# EAGLE board SGP30 Breakout-Panel (EAGLE 9.3.0)
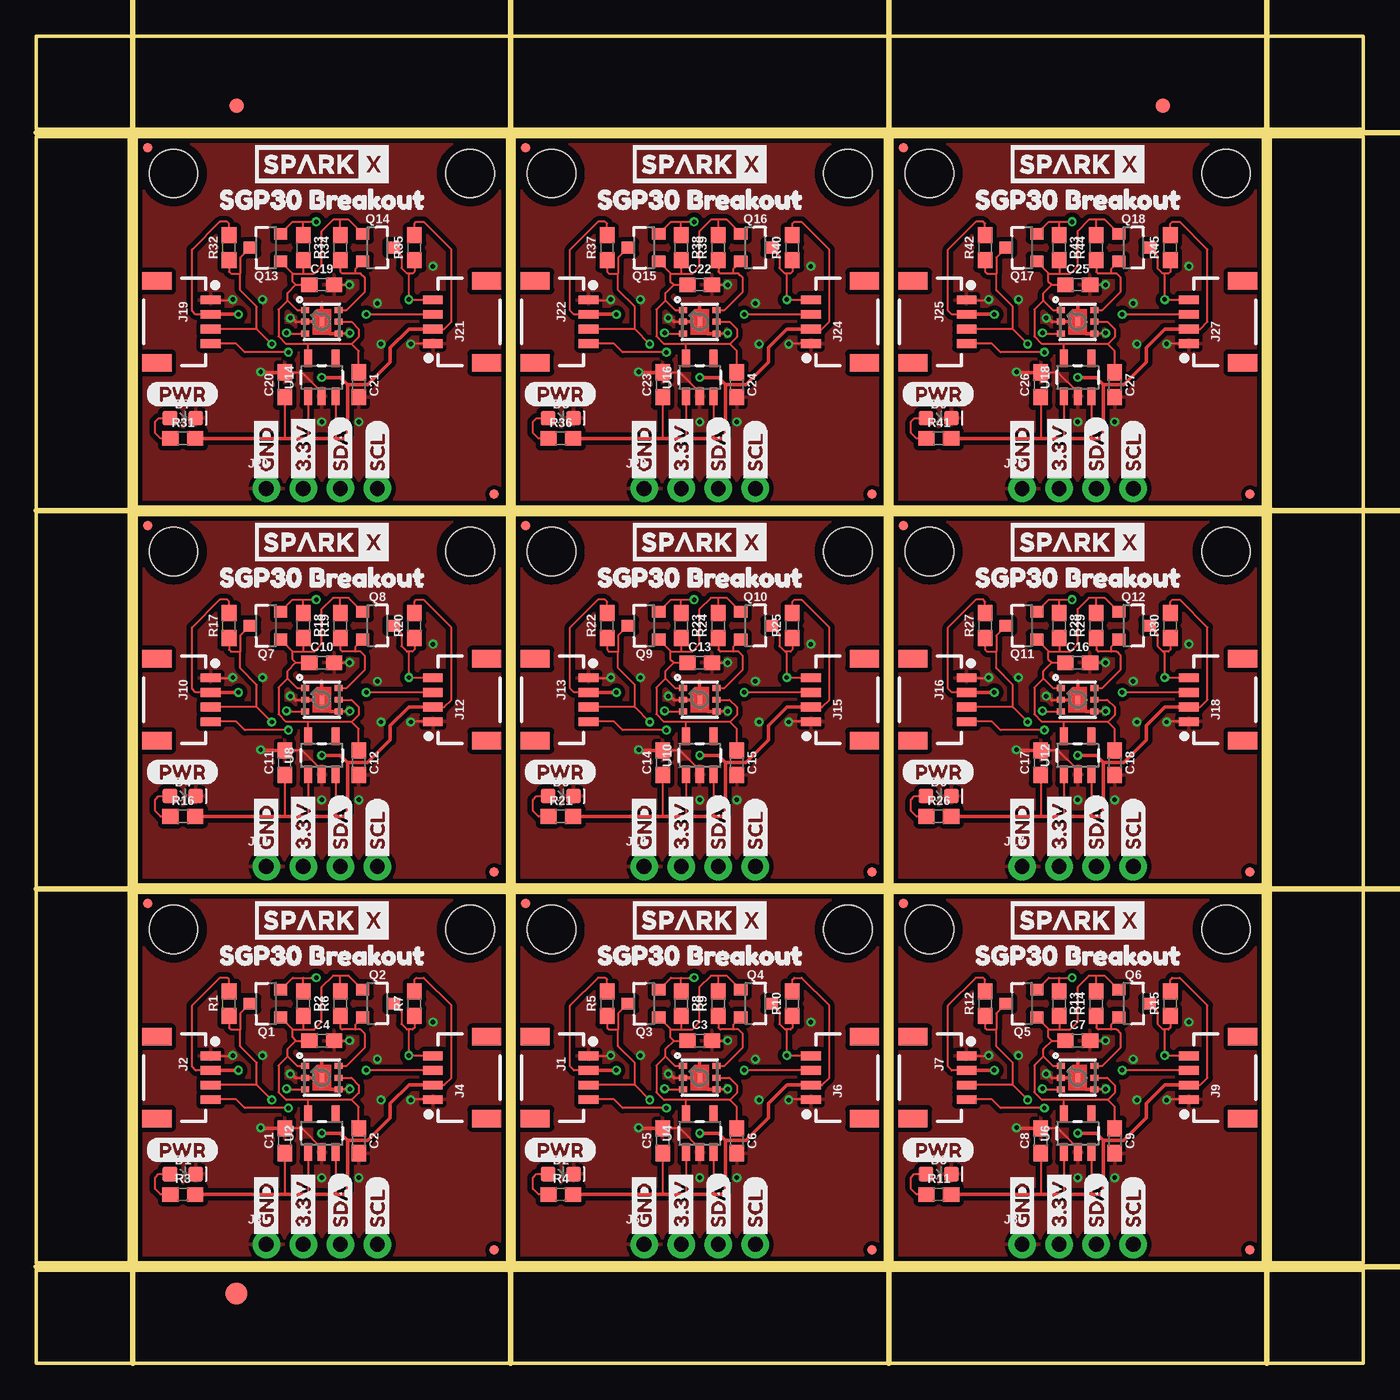
[diagram p0: board, top side]
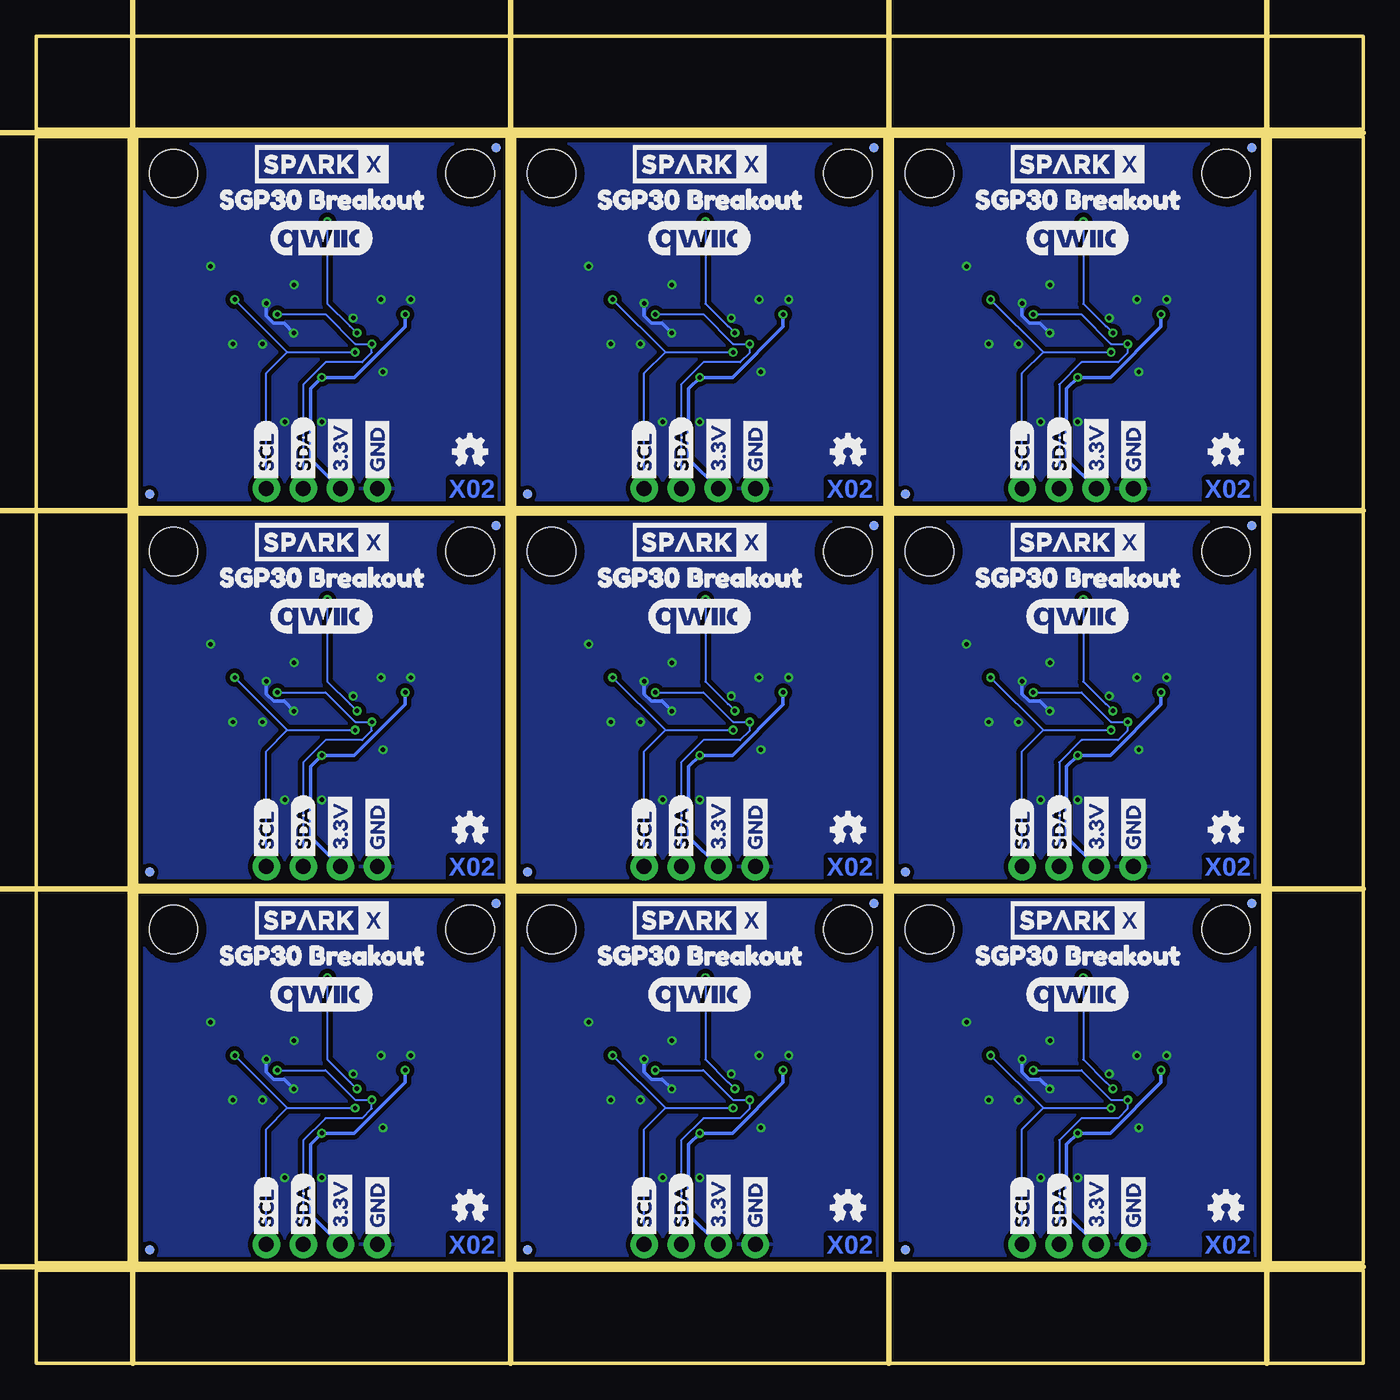
[diagram p1: board, bottom side, seen from below]

Size 90.93 x 90.93 mm. Coordinates in mm from the lower left corner, seen from the top.
Outline: 6.86,6.86 6.86,32.26 32.26,32.26 32.26,6.86 6.86,6.86
Outline: 32.77,6.86 32.77,32.26 58.17,32.26 58.17,6.86 32.77,6.86
Outline: 58.67,6.86 58.67,32.26 84.07,32.26 84.07,6.86 58.67,6.86
Outline: 6.86,32.77 6.86,58.17 32.26,58.17 32.26,32.77 6.86,32.77
Outline: 32.77,32.77 32.77,58.17 58.17,58.17 58.17,32.77 32.77,32.77
Outline: 58.67,32.77 58.67,58.17 84.07,58.17 84.07,32.77 58.67,32.77
Outline: 6.86,58.67 6.86,84.07 32.26,84.07 32.26,58.67 6.86,58.67
Outline: 32.77,58.67 32.77,84.07 58.17,84.07 58.17,58.67 32.77,58.67
Outline: 58.67,58.67 58.67,84.07 84.07,84.07 84.07,58.67 58.67,58.67
Outline: 0,6.35 90.93,6.35 90.93,0 0,0 0,6.35
Outline: 84.58,84.07 90.93,84.07 90.93,6.86 84.58,6.86 84.58,84.07
Outline: 0,90.93 90.93,90.93 90.93,84.58 0,84.58 0,90.93
Outline: 0,84.07 6.35,84.07 6.35,6.86 0,6.86 0,84.07
Copper layers (1*16): Top 0.035mm / dielectric 1.5mm / Bottom 0.035mm
Design rules "SparkFun-2-layer-PCBWay-LIMIT": minimum track width 6mil, minimum drill 0.3mm, track to track 6mil, track to pad 6mil, pad to pad 6mil, via to via 6mil, smd to smd 6mil, copper to edge 6mil, drill to drill 6mil, minimum pad ring 6mil, minimum via ring 6mil, stop-mask expansion 4mil, vias tented up to drill 25mil, thermal gap 10mil
Milling: 8 lines

## Footprints (pad centres in the part's own frame; a part is rotated, then mirrored left to right if it is on the bottom)
0603 = smd 1.1 x 1: 1 -0.85,0; 2 0.85,0
LED-0603 = smd 1 x 1: A -0.877,0; C 0.877,0
FIDUCIAL-1X2 = smd 1 x 1: 1 0,0
FIDUCIAL-1.5X3 = smd 1.5 x 1.5: 1 0,0
1X04_1MM_RA = smd 0.6 x 1.35: 1 -1.5,0; 2 -0.5,0; 3 0.5,0; 4 1.5,0 | smd 1.2 x 2: NC1 2.8,-3.675; NC2 -2.8,-3.675
1X04_NO_SILK = drill 1.016 pad 1.88: 1 0,0; 2 2.54,0; 3 5.08,0; 4 7.62,0
MICRO-FIDUCIAL = smd 0.635 x 0.635: 1 0,0
STAND-OFF = hole 3.302: 0,0
SOT23-3 = smd 0.8 x 0.9: 1 -0.95,-1; 2 0.95,-1; 3 0,1.1
SGP30 = smd 0.55 x 0.4: 1 -1.15,0.8; 2 -1.15,0; 3 -1.15,-0.8; 4 1.15,-0.8; 5 1.15,0; 6 1.15,0.8 | smd 0.305 x 0.61: DIEPAD 0,0
SOT23-5 = smd 0.55 x 1.2: 1 -0.95,-1.3; 2 0,-1.3; 3 0.95,-1.3; 4 0.95,1.3; 5 -0.95,1.3

## Placement (x,y rotation side)
C1  1.0uF  [0603]  17.02,15.24 90 top
C2  1.0uF  [0603]  22.1,15.24 270 top
C3  0.1uF  [0603]  45.47,22.1 0 top
C4  0.1uF  [0603]  19.56,22.1 0 top
C5  1.0uF  [0603]  42.93,15.24 90 top
C6  1.0uF  [0603]  48.01,15.24 270 top
C7  0.1uF  [0603]  71.37,22.1 0 top
C8  1.0uF  [0603]  68.83,15.24 90 top
C9  1.0uF  [0603]  73.91,15.24 270 top
C10  0.1uF  [0603]  19.56,48.01 0 top
C11  1.0uF  [0603]  17.02,41.15 90 top
C12  1.0uF  [0603]  22.1,41.15 270 top
C13  0.1uF  [0603]  45.47,48.01 0 top
C14  1.0uF  [0603]  42.93,41.15 90 top
C15  1.0uF  [0603]  48.01,41.15 270 top
C16  0.1uF  [0603]  71.37,48.01 0 top
C17  1.0uF  [0603]  68.83,41.15 90 top
C18  1.0uF  [0603]  73.91,41.15 270 top
C19  0.1uF  [0603]  19.56,73.91 0 top
C20  1.0uF  [0603]  17.02,67.06 90 top
C21  1.0uF  [0603]  22.1,67.06 270 top
C22  0.1uF  [0603]  45.47,73.91 0 top
C23  1.0uF  [0603]  42.93,67.06 90 top
C24  1.0uF  [0603]  48.01,67.06 270 top
C25  0.1uF  [0603]  71.37,73.91 0 top
C26  1.0uF  [0603]  68.83,67.06 90 top
C27  1.0uF  [0603]  73.91,67.06 270 top
D1  RED  [LED-0603]  10.03,12.95 0 top
D2  RED  [LED-0603]  35.94,12.95 0 top
D3  RED  [LED-0603]  61.85,12.95 0 top
D4  RED  [LED-0603]  10.03,38.86 0 top
D5  RED  [LED-0603]  35.94,38.86 0 top
D6  RED  [LED-0603]  61.85,38.86 0 top
D7  RED  [LED-0603]  10.03,64.77 0 top
D8  RED  [LED-0603]  35.94,64.77 0 top
D9  RED  [LED-0603]  61.85,64.77 0 top
E$1  [FIDUCIAL-1X2]  13.72,86.17 0 top
E$2  [FIDUCIAL-1X2]  77.22,86.17 0 top
E$3  [FIDUCIAL-1.5X3]  13.72,4.76 0 top
J1  [1X04_1MM_RA]  37.85,19.56 270 top
J2  [1X04_1MM_RA]  11.94,19.56 270 top
J3  PTH  [1X04_NO_SILK]  15.75,8.13 0 top
J4  [1X04_1MM_RA]  27.18,19.56 90 top
J5  PTH  [1X04_NO_SILK]  41.66,8.13 0 top
J6  [1X04_1MM_RA]  53.09,19.56 90 top
J7  [1X04_1MM_RA]  63.75,19.56 270 top
J8  PTH  [1X04_NO_SILK]  67.56,8.13 0 top
J9  [1X04_1MM_RA]  78.99,19.56 90 top
J10  [1X04_1MM_RA]  11.94,45.47 270 top
J11  PTH  [1X04_NO_SILK]  15.75,34.04 0 top
J12  [1X04_1MM_RA]  27.18,45.47 90 top
J13  [1X04_1MM_RA]  37.85,45.47 270 top
J14  PTH  [1X04_NO_SILK]  41.66,34.04 0 top
J15  [1X04_1MM_RA]  53.09,45.47 90 top
J16  [1X04_1MM_RA]  63.75,45.47 270 top
J17  PTH  [1X04_NO_SILK]  67.56,34.04 0 top
J18  [1X04_1MM_RA]  78.99,45.47 90 top
J19  [1X04_1MM_RA]  11.94,71.37 270 top
J20  PTH  [1X04_NO_SILK]  15.75,59.94 0 top
J21  [1X04_1MM_RA]  27.18,71.37 90 top
J22  [1X04_1MM_RA]  37.85,71.37 270 top
J23  PTH  [1X04_NO_SILK]  41.66,59.94 0 top
J24  [1X04_1MM_RA]  53.09,71.37 90 top
J25  [1X04_1MM_RA]  63.75,71.37 270 top
J26  PTH  [1X04_NO_SILK]  67.56,59.94 0 top
J27  [1X04_1MM_RA]  78.99,71.37 90 top
JP1  FIDUCIALUFIDUCIAL  [MICRO-FIDUCIAL]  7.62,31.5 0 bottom
JP2  FIDUCIALUFIDUCIAL  [MICRO-FIDUCIAL]  31.37,7.75 0 top
JP3  STAND-OFF  [STAND-OFF]  9.4,29.72 0 top
JP4  STAND-OFF  [STAND-OFF]  29.72,29.72 0 top
JP5  FIDUCIALUFIDUCIAL  [MICRO-FIDUCIAL]  31.37,7.75 0 bottom
JP6  FIDUCIALUFIDUCIAL  [MICRO-FIDUCIAL]  7.62,31.5 0 top
JP7  STAND-OFF  [STAND-OFF]  35.31,29.72 0 top
JP8  STAND-OFF  [STAND-OFF]  55.63,29.72 0 top
JP9  FIDUCIALUFIDUCIAL  [MICRO-FIDUCIAL]  57.28,7.75 0 top
JP10  FIDUCIALUFIDUCIAL  [MICRO-FIDUCIAL]  33.53,31.5 0 top
JP11  FIDUCIALUFIDUCIAL  [MICRO-FIDUCIAL]  33.53,31.5 0 bottom
JP12  FIDUCIALUFIDUCIAL  [MICRO-FIDUCIAL]  57.28,7.75 0 bottom
JP13  STAND-OFF  [STAND-OFF]  61.21,29.72 0 top
JP14  STAND-OFF  [STAND-OFF]  81.53,29.72 0 top
JP15  FIDUCIALUFIDUCIAL  [MICRO-FIDUCIAL]  83.19,7.75 0 top
JP16  FIDUCIALUFIDUCIAL  [MICRO-FIDUCIAL]  59.44,31.5 0 top
JP17  FIDUCIALUFIDUCIAL  [MICRO-FIDUCIAL]  59.44,31.5 0 bottom
JP18  FIDUCIALUFIDUCIAL  [MICRO-FIDUCIAL]  83.19,7.75 0 bottom
JP19  STAND-OFF  [STAND-OFF]  9.4,55.63 0 top
JP20  STAND-OFF  [STAND-OFF]  29.72,55.63 0 top
JP21  FIDUCIALUFIDUCIAL  [MICRO-FIDUCIAL]  31.37,33.66 0 top
JP22  FIDUCIALUFIDUCIAL  [MICRO-FIDUCIAL]  7.62,57.4 0 top
JP23  FIDUCIALUFIDUCIAL  [MICRO-FIDUCIAL]  7.62,57.4 0 bottom
JP24  FIDUCIALUFIDUCIAL  [MICRO-FIDUCIAL]  31.37,33.66 0 bottom
JP25  STAND-OFF  [STAND-OFF]  35.31,55.63 0 top
JP26  STAND-OFF  [STAND-OFF]  55.63,55.63 0 top
JP27  FIDUCIALUFIDUCIAL  [MICRO-FIDUCIAL]  57.28,33.66 0 top
JP28  FIDUCIALUFIDUCIAL  [MICRO-FIDUCIAL]  33.53,57.4 0 top
JP29  FIDUCIALUFIDUCIAL  [MICRO-FIDUCIAL]  33.53,57.4 0 bottom
JP30  FIDUCIALUFIDUCIAL  [MICRO-FIDUCIAL]  57.28,33.66 0 bottom
JP31  STAND-OFF  [STAND-OFF]  61.21,55.63 0 top
JP32  STAND-OFF  [STAND-OFF]  81.53,55.63 0 top
JP33  FIDUCIALUFIDUCIAL  [MICRO-FIDUCIAL]  83.19,33.66 0 top
JP34  FIDUCIALUFIDUCIAL  [MICRO-FIDUCIAL]  59.44,57.4 0 top
JP35  FIDUCIALUFIDUCIAL  [MICRO-FIDUCIAL]  59.44,57.4 0 bottom
JP36  FIDUCIALUFIDUCIAL  [MICRO-FIDUCIAL]  83.19,33.66 0 bottom
JP37  STAND-OFF  [STAND-OFF]  9.4,81.53 0 top
JP38  STAND-OFF  [STAND-OFF]  29.72,81.53 0 top
JP39  FIDUCIALUFIDUCIAL  [MICRO-FIDUCIAL]  31.37,59.56 0 top
JP40  FIDUCIALUFIDUCIAL  [MICRO-FIDUCIAL]  7.62,83.31 0 top
JP41  FIDUCIALUFIDUCIAL  [MICRO-FIDUCIAL]  7.62,83.31 0 bottom
JP42  FIDUCIALUFIDUCIAL  [MICRO-FIDUCIAL]  31.37,59.56 0 bottom
JP43  STAND-OFF  [STAND-OFF]  35.31,81.53 0 top
JP44  STAND-OFF  [STAND-OFF]  55.63,81.53 0 top
JP45  FIDUCIALUFIDUCIAL  [MICRO-FIDUCIAL]  57.28,59.56 0 top
JP46  FIDUCIALUFIDUCIAL  [MICRO-FIDUCIAL]  33.53,83.31 0 top
JP47  FIDUCIALUFIDUCIAL  [MICRO-FIDUCIAL]  33.53,83.31 0 bottom
JP48  FIDUCIALUFIDUCIAL  [MICRO-FIDUCIAL]  57.28,59.56 0 bottom
JP49  STAND-OFF  [STAND-OFF]  61.21,81.53 0 top
JP50  STAND-OFF  [STAND-OFF]  81.53,81.53 0 top
JP51  FIDUCIALUFIDUCIAL  [MICRO-FIDUCIAL]  83.19,59.56 0 top
JP52  FIDUCIALUFIDUCIAL  [MICRO-FIDUCIAL]  59.44,83.31 0 top
JP53  FIDUCIALUFIDUCIAL  [MICRO-FIDUCIAL]  59.44,83.31 0 bottom
JP54  FIDUCIALUFIDUCIAL  [MICRO-FIDUCIAL]  83.19,59.56 0 bottom
LOGO1  OSHW-LOGOMINI  [OSHW-LOGO-MINI]  9.4,10.67 0 bottom
LOGO2  OSHW-LOGOMINI  [OSHW-LOGO-MINI]  35.31,10.67 0 bottom
LOGO3  OSHW-LOGOMINI  [OSHW-LOGO-MINI]  61.21,10.67 0 bottom
LOGO4  OSHW-LOGOMINI  [OSHW-LOGO-MINI]  9.4,36.58 0 bottom
LOGO5  OSHW-LOGOMINI  [OSHW-LOGO-MINI]  35.31,36.58 0 bottom
LOGO6  OSHW-LOGOMINI  [OSHW-LOGO-MINI]  61.21,36.58 0 bottom
LOGO7  OSHW-LOGOMINI  [OSHW-LOGO-MINI]  9.4,62.48 0 bottom
LOGO8  OSHW-LOGOMINI  [OSHW-LOGO-MINI]  35.31,62.48 0 bottom
LOGO9  OSHW-LOGOMINI  [OSHW-LOGO-MINI]  61.21,62.48 0 bottom
Q1  [SOT23-3]  15.75,24.64 90 top
Q2  [SOT23-3]  23.37,24.64 270 top
Q3  [SOT23-3]  41.66,24.64 90 top
Q4  [SOT23-3]  49.28,24.64 270 top
Q5  [SOT23-3]  67.56,24.64 90 top
Q6  [SOT23-3]  75.18,24.64 270 top
Q7  [SOT23-3]  15.75,50.55 90 top
Q8  [SOT23-3]  23.37,50.55 270 top
Q9  [SOT23-3]  41.66,50.55 90 top
Q10  [SOT23-3]  49.28,50.55 270 top
Q11  [SOT23-3]  67.56,50.55 90 top
Q12  [SOT23-3]  75.18,50.55 270 top
Q13  [SOT23-3]  15.75,76.45 90 top
Q14  [SOT23-3]  23.37,76.45 270 top
Q15  [SOT23-3]  41.66,76.45 90 top
Q16  [SOT23-3]  49.28,76.45 270 top
Q17  [SOT23-3]  67.56,76.45 90 top
Q18  [SOT23-3]  75.18,76.45 270 top
R1  10k  [0603]  13.21,24.64 90 top
R2  10k  [0603]  18.29,24.64 270 top
R3  1k  [0603]  10.03,11.56 0 top
R4  1k  [0603]  35.94,11.56 0 top
R5  10k  [0603]  39.12,24.64 90 top
R6  10k  [0603]  20.83,24.64 90 top
R7  10k  [0603]  25.91,24.64 90 top
R8  10k  [0603]  44.2,24.64 270 top
R9  10k  [0603]  46.74,24.64 90 top
R10  10k  [0603]  51.82,24.64 90 top
R11  1k  [0603]  61.85,11.56 0 top
R12  10k  [0603]  65.02,24.64 90 top
R13  10k  [0603]  70.1,24.64 270 top
R14  10k  [0603]  72.64,24.64 90 top
R15  10k  [0603]  77.72,24.64 90 top
R16  1k  [0603]  10.03,37.46 0 top
R17  10k  [0603]  13.21,50.55 90 top
R18  10k  [0603]  18.29,50.55 270 top
R19  10k  [0603]  20.83,50.55 90 top
R20  10k  [0603]  25.91,50.55 90 top
R21  1k  [0603]  35.94,37.46 0 top
R22  10k  [0603]  39.12,50.55 90 top
R23  10k  [0603]  44.2,50.55 270 top
R24  10k  [0603]  46.74,50.55 90 top
R25  10k  [0603]  51.82,50.55 90 top
R26  1k  [0603]  61.85,37.46 0 top
R27  10k  [0603]  65.02,50.55 90 top
R28  10k  [0603]  70.1,50.55 270 top
R29  10k  [0603]  72.64,50.55 90 top
R30  10k  [0603]  77.72,50.55 90 top
R31  1k  [0603]  10.03,63.37 0 top
R32  10k  [0603]  13.21,76.45 90 top
R33  10k  [0603]  18.29,76.45 270 top
R34  10k  [0603]  20.83,76.45 90 top
R35  10k  [0603]  25.91,76.45 90 top
R36  1k  [0603]  35.94,63.37 0 top
R37  10k  [0603]  39.12,76.45 90 top
R38  10k  [0603]  44.2,76.45 270 top
R39  10k  [0603]  46.74,76.45 90 top
R40  10k  [0603]  51.82,76.45 90 top
R41  1k  [0603]  61.85,63.37 0 top
R42  10k  [0603]  65.02,76.45 90 top
R43  10k  [0603]  70.1,76.45 270 top
R44  10k  [0603]  72.64,76.45 90 top
R45  10k  [0603]  77.72,76.45 90 top
U1  SGP30  [SGP30]  19.56,19.56 0 top
U2  AP2112k  [SOT23-5]  19.56,15.75 0 top
U3  SGP30  [SGP30]  45.47,19.56 0 top
U4  AP2112k  [SOT23-5]  45.47,15.75 0 top
U5  SGP30  [SGP30]  71.37,19.56 0 top
U6  AP2112k  [SOT23-5]  71.37,15.75 0 top
U7  SGP30  [SGP30]  19.56,45.47 0 top
U8  AP2112k  [SOT23-5]  19.56,41.66 0 top
U9  SGP30  [SGP30]  45.47,45.47 0 top
U10  AP2112k  [SOT23-5]  45.47,41.66 0 top
U11  SGP30  [SGP30]  71.37,45.47 0 top
U12  AP2112k  [SOT23-5]  71.37,41.66 0 top
U13  SGP30  [SGP30]  19.56,71.37 0 top
U14  AP2112k  [SOT23-5]  19.56,67.56 0 top
U15  SGP30  [SGP30]  45.47,71.37 0 top
U16  AP2112k  [SOT23-5]  45.47,67.56 0 top
U17  SGP30  [SGP30]  71.37,71.37 0 top
U18  AP2112k  [SOT23-5]  71.37,67.56 0 top
U$1  SPARKX-LOGO4  [SPARKX-MEDIUM]  19.56,30.35 0 top
U$2  SPARKX-LOGO4  [SPARKX-MEDIUM]  19.56,30.35 0 bottom
U$3  [GND1]  15.75,8.38 90 bottom
U$4  [3#3V2]  18.29,8.38 90 bottom
U$5  [SDA8]  20.83,8.38 90 bottom
U$6  [SCL9]  23.37,8.38 90 bottom
U$7  [SGP30_BREAKOUT1]  11.43,27.94 0 top
U$8  [SGP30_BREAKOUT1]  27.69,27.94 0 bottom
U$9  QWIIC_LOGO_7MM  [QWIIC_7MM]  19.56,25.27 0 bottom
U$10  [(PWR)]  7.49,14.61 0 top
U$11  SPARKX-LOGO4  [SPARKX-MEDIUM]  45.47,30.35 0 bottom
U$12  SPARKX-LOGO4  [SPARKX-MEDIUM]  45.47,30.35 0 top
U$13  [3#3V2]  44.2,8.38 90 top
U$14  [GND1]  41.66,8.38 90 top
U$15  [SCL9]  49.28,8.38 90 top
U$16  [SDA8]  46.74,8.38 90 top
U$17  [GND1]  41.66,8.38 90 bottom
U$18  [3#3V2]  44.2,8.38 90 bottom
U$19  [SDA8]  46.74,8.38 90 bottom
U$20  [SCL9]  49.28,8.38 90 bottom
U$21  [3#3V2]  18.29,8.38 90 top
U$22  [GND1]  15.75,8.38 90 top
U$23  [(PWR)]  33.4,14.61 0 top
U$24  [SGP30_BREAKOUT1]  37.34,27.94 0 top
U$25  [SGP30_BREAKOUT1]  53.59,27.94 0 bottom
U$26  [SCL9]  23.37,8.38 90 top
U$27  [SDA8]  20.83,8.38 90 top
U$28  QWIIC_LOGO_7MM  [QWIIC_7MM]  45.47,25.27 0 bottom
U$29  SPARKX-LOGO4  [SPARKX-MEDIUM]  71.37,30.35 0 bottom
U$30  SPARKX-LOGO4  [SPARKX-MEDIUM]  71.37,30.35 0 top
U$31  [3#3V2]  70.1,8.38 90 top
U$32  [GND1]  67.56,8.38 90 top
U$33  [SCL9]  75.18,8.38 90 top
U$34  [SDA8]  72.64,8.38 90 top
U$35  [GND1]  67.56,8.38 90 bottom
U$36  [3#3V2]  70.1,8.38 90 bottom
U$37  [SDA8]  72.64,8.38 90 bottom
U$38  [SCL9]  75.18,8.38 90 bottom
U$39  [(PWR)]  59.31,14.61 0 top
U$40  [SGP30_BREAKOUT1]  63.25,27.94 0 top
U$41  [SGP30_BREAKOUT1]  79.5,27.94 0 bottom
U$42  QWIIC_LOGO_7MM  [QWIIC_7MM]  71.37,25.27 0 bottom
U$43  SPARKX-LOGO4  [SPARKX-MEDIUM]  19.56,56.26 0 bottom
U$44  SPARKX-LOGO4  [SPARKX-MEDIUM]  19.56,56.26 0 top
U$45  [3#3V2]  18.29,34.29 90 top
U$46  [GND1]  15.75,34.29 90 top
U$47  [SCL9]  23.37,34.29 90 top
U$48  [SDA8]  20.83,34.29 90 top
U$49  [GND1]  15.75,34.29 90 bottom
U$50  [3#3V2]  18.29,34.29 90 bottom
U$51  [SDA8]  20.83,34.29 90 bottom
U$52  [SCL9]  23.37,34.29 90 bottom
U$53  [(PWR)]  7.49,40.51 0 top
U$54  [SGP30_BREAKOUT1]  11.43,53.85 0 top
U$55  [SGP30_BREAKOUT1]  27.69,53.85 0 bottom
U$56  QWIIC_LOGO_7MM  [QWIIC_7MM]  19.56,51.18 0 bottom
U$57  SPARKX-LOGO4  [SPARKX-MEDIUM]  45.47,56.26 0 bottom
U$58  SPARKX-LOGO4  [SPARKX-MEDIUM]  45.47,56.26 0 top
U$59  [3#3V2]  44.2,34.29 90 top
U$60  [GND1]  41.66,34.29 90 top
U$61  [SCL9]  49.28,34.29 90 top
U$62  [SDA8]  46.74,34.29 90 top
U$63  [GND1]  41.66,34.29 90 bottom
U$64  [3#3V2]  44.2,34.29 90 bottom
U$65  [SDA8]  46.74,34.29 90 bottom
U$66  [SCL9]  49.28,34.29 90 bottom
U$67  [(PWR)]  33.4,40.51 0 top
U$68  [SGP30_BREAKOUT1]  37.34,53.85 0 top
U$69  [SGP30_BREAKOUT1]  53.59,53.85 0 bottom
U$70  QWIIC_LOGO_7MM  [QWIIC_7MM]  45.47,51.18 0 bottom
U$71  SPARKX-LOGO4  [SPARKX-MEDIUM]  71.37,56.26 0 bottom
U$72  SPARKX-LOGO4  [SPARKX-MEDIUM]  71.37,56.26 0 top
U$73  [3#3V2]  70.1,34.29 90 top
U$74  [GND1]  67.56,34.29 90 top
U$75  [SCL9]  75.18,34.29 90 top
U$76  [SDA8]  72.64,34.29 90 top
U$77  [GND1]  67.56,34.29 90 bottom
U$78  [3#3V2]  70.1,34.29 90 bottom
U$79  [SDA8]  72.64,34.29 90 bottom
U$80  [SCL9]  75.18,34.29 90 bottom
U$81  [(PWR)]  59.31,40.51 0 top
U$82  [SGP30_BREAKOUT1]  63.25,53.85 0 top
U$83  [SGP30_BREAKOUT1]  79.5,53.85 0 bottom
U$84  QWIIC_LOGO_7MM  [QWIIC_7MM]  71.37,51.18 0 bottom
U$85  SPARKX-LOGO4  [SPARKX-MEDIUM]  19.56,82.17 0 bottom
U$86  SPARKX-LOGO4  [SPARKX-MEDIUM]  19.56,82.17 0 top
U$87  [3#3V2]  18.29,60.2 90 top
U$88  [GND1]  15.75,60.2 90 top
U$89  [SCL9]  23.37,60.2 90 top
U$90  [SDA8]  20.83,60.2 90 top
U$91  [GND1]  15.75,60.2 90 bottom
U$92  [3#3V2]  18.29,60.2 90 bottom
U$93  [SDA8]  20.83,60.2 90 bottom
U$94  [SCL9]  23.37,60.2 90 bottom
U$95  [(PWR)]  7.49,66.42 0 top
U$96  [SGP30_BREAKOUT1]  11.43,79.76 0 top
U$97  [SGP30_BREAKOUT1]  27.69,79.76 0 bottom
U$98  QWIIC_LOGO_7MM  [QWIIC_7MM]  19.56,77.09 0 bottom
U$99  SPARKX-LOGO4  [SPARKX-MEDIUM]  45.47,82.17 0 bottom
U$100  SPARKX-LOGO4  [SPARKX-MEDIUM]  45.47,82.17 0 top
U$101  [3#3V2]  44.2,60.2 90 top
U$102  [GND1]  41.66,60.2 90 top
U$103  [SCL9]  49.28,60.2 90 top
U$104  [SDA8]  46.74,60.2 90 top
U$105  [GND1]  41.66,60.2 90 bottom
U$106  [3#3V2]  44.2,60.2 90 bottom
U$107  [SDA8]  46.74,60.2 90 bottom
U$108  [SCL9]  49.28,60.2 90 bottom
U$109  [(PWR)]  33.4,66.42 0 top
U$110  [SGP30_BREAKOUT1]  37.34,79.76 0 top
U$111  [SGP30_BREAKOUT1]  53.59,79.76 0 bottom
U$112  QWIIC_LOGO_7MM  [QWIIC_7MM]  45.47,77.09 0 bottom
U$113  SPARKX-LOGO4  [SPARKX-MEDIUM]  71.37,82.17 0 bottom
U$114  SPARKX-LOGO4  [SPARKX-MEDIUM]  71.37,82.17 0 top
U$115  [3#3V2]  70.1,60.2 90 top
U$116  [GND1]  67.56,60.2 90 top
U$117  [SCL9]  75.18,60.2 90 top
U$118  [SDA8]  72.64,60.2 90 top
U$119  [GND1]  67.56,60.2 90 bottom
U$120  [3#3V2]  70.1,60.2 90 bottom
U$121  [SDA8]  72.64,60.2 90 bottom
U$122  [SCL9]  75.18,60.2 90 bottom
U$123  [(PWR)]  59.31,66.42 0 top
U$124  [SGP30_BREAKOUT1]  63.25,79.76 0 top
U$125  [SGP30_BREAKOUT1]  79.5,79.76 0 bottom
U$126  QWIIC_LOGO_7MM  [QWIIC_7MM]  71.37,77.09 0 bottom

## Library data of the parts
C1 C2 C5 C6 C8 C9 C11 C12 C14 C15 C17 C18 C20 C21 C23 C24 C26 C27 = SparkFun-Capacitors; PROD_ID: CAP-00868
C3 C4 C7 C10 C13 C16 C19 C22 C25 = SparkFun-Capacitors; PROD_ID: CAP-00810
D1-D9 = SparkFun-LED; PROD_ID: DIO-00819
E$1 E$2 LOGO1-LOGO9 U$9 U$28 U$42 U$56 U$70 U$84 U$98 U$112 U$126 = SparkFun-Aesthetics
E$3 = SparkFun-Retired
J1 J2 J4 J6 J7 J9 J10 J12 J13 J15 J16 J18 J19 J21 J22 J24 J25 J27 = SparkFun-Connectors; PROD_ID: CONN-13694
J3 J5 J8 J11 J14 J17 J20 J23 J26 U$1 U$2 U$11 U$12 U$29 U$30 U$43 U$44 U$57 U$58 U$71 U$72 U$85 U$86 U$99 U$100 U$113 U$114 = SparkX
JP1-JP54 = SparkFun
Q1-Q18 = SparkFun-DiscreteSemi; PROD_ID: TRANS-00830
R1 R2 R5-R10 R12-R15 R17-R20 R22-R25 R27-R30 R32-R35 R37-R40 R42-R45 = SparkFun-Resistors; PROD_ID: RES-00824
R3 R4 R11 R16 R21 R26 R31 R36 R41 = SparkFun-Resistors; PROD_ID: RES-07856
U1-U18 = SGP30
U$3-U$6 U$10 U$13-U$23 U$26 U$27 U$31-U$39 U$45-U$53 U$59-U$67 U$73-U$81 U$87-U$95 U$101-U$109 U$115-U$123 = Labels-0_04
U$7 U$8 U$24 U$25 U$40 U$41 U$54 U$55 U$68 U$69 U$82 U$83 U$96 U$97 U$110 U$111 U$124 U$125 = buzzard_labels (9)

## Nets
1.8V: C2.1 C4.1 Q1.1 Q2.1 R2.2 R6.2 U1.1 U1.5 U2.5
1.8V1: C3.1 C6.1 Q3.1 Q4.1 R8.2 R9.2 U3.1 U3.5 U4.5
1.8V2: C7.1 C9.1 Q5.1 Q6.1 R13.2 R14.2 U5.1 U5.5 U6.5
1.8V3: C10.1 C12.1 Q7.1 Q8.1 R18.2 R19.2 U7.1 U7.5 U8.5
1.8V4: C13.1 C15.1 Q9.1 Q10.1 R23.2 R24.2 U9.1 U9.5 U10.5
1.8V5: C16.1 C18.1 Q11.1 Q12.1 R28.2 R29.2 U11.1 U11.5 U12.5
1.8V6: C19.1 C21.1 Q13.1 Q14.1 R33.2 R34.2 U13.1 U13.5 U14.5
1.8V7: C22.1 C24.1 Q15.1 Q16.1 R38.2 R39.2 U15.1 U15.5 U16.5
1.8V8: C25.1 C27.1 Q17.1 Q18.1 R43.2 R44.2 U17.1 U17.5 U18.5
3.3V: C1.1 J2.2 J3.2 J4.2 R1.2 R3.2 R7.2 U2.1 U2.3
3.3V1: C5.1 J1.2 J5.2 J6.2 R4.2 R5.2 R10.2 U4.1 U4.3
3.3V2: C8.1 J7.2 J8.2 J9.2 R11.2 R12.2 R15.2 U6.1 U6.3
3.3V3: C11.1 J10.2 J11.2 J12.2 R16.2 R17.2 R20.2 U8.1 U8.3
3.3V4: C14.1 J13.2 J14.2 J15.2 R21.2 R22.2 R25.2 U10.1 U10.3
3.3V5: C17.1 J16.2 J17.2 J18.2 R26.2 R27.2 R30.2 U12.1 U12.3
3.3V6: C20.1 J19.2 J20.2 J21.2 R31.2 R32.2 R35.2 U14.1 U14.3
3.3V7: C23.1 J22.2 J23.2 J24.2 R36.2 R37.2 R40.2 U16.1 U16.3
3.3V8: C26.1 J25.2 J26.2 J27.2 R41.2 R42.2 R45.2 U18.1 U18.3
GND: C1.2 C2.2 C4.2 D1.C J2.1 J3.1 J4.1 U1.2 U1.4 U1.DIEPAD U2.2
GND1: C3.2 C5.2 C6.2 D2.C J1.1 J5.1 J6.1 U3.2 U3.4 U3.DIEPAD U4.2
GND2: C7.2 C8.2 C9.2 D3.C J7.1 J8.1 J9.1 U5.2 U5.4 U5.DIEPAD U6.2
GND3: C10.2 C11.2 C12.2 D4.C J10.1 J11.1 J12.1 U7.2 U7.4 U7.DIEPAD U8.2
GND4: C13.2 C14.2 C15.2 D5.C J13.1 J14.1 J15.1 U9.2 U9.4 U9.DIEPAD U10.2
GND5: C16.2 C17.2 C18.2 D6.C J16.1 J17.1 J18.1 U11.2 U11.4 U11.DIEPAD U12.2
GND6: C19.2 C20.2 C21.2 D7.C J19.1 J20.1 J21.1 U13.2 U13.4 U13.DIEPAD U14.2
GND7: C22.2 C23.2 C24.2 D8.C J22.1 J23.1 J24.1 U15.2 U15.4 U15.DIEPAD U16.2
GND8: C25.2 C26.2 C27.2 D9.C J25.1 J26.1 J27.1 U17.2 U17.4 U17.DIEPAD U18.2
LSCL: Q2.2 R6.1 U1.6
LSCL1: Q4.2 R9.1 U3.6
LSCL2: Q6.2 R14.1 U5.6
LSCL3: Q8.2 R19.1 U7.6
LSCL4: Q10.2 R24.1 U9.6
LSCL5: Q12.2 R29.1 U11.6
LSCL6: Q14.2 R34.1 U13.6
LSCL7: Q16.2 R39.1 U15.6
LSCL8: Q18.2 R44.1 U17.6
LSDA: Q1.2 R2.1 U1.3
LSDA1: Q3.2 R8.1 U3.3
LSDA2: Q5.2 R13.1 U5.3
LSDA3: Q7.2 R18.1 U7.3
LSDA4: Q9.2 R23.1 U9.3
LSDA5: Q11.2 R28.1 U11.3
LSDA6: Q13.2 R33.1 U13.3
LSDA7: Q15.2 R38.1 U15.3
LSDA8: Q17.2 R43.1 U17.3
N$1: D2.A R4.1
N$2: D3.A R11.1
N$3: D1.A R3.1
N$4: D4.A R16.1
N$5: D5.A R21.1
N$6: D6.A R26.1
N$7: D7.A R31.1
N$8: D8.A R36.1
N$9: D9.A R41.1
SCL: J2.4 J3.4 J4.4 Q2.3 R7.1
SCL1: J1.4 J5.4 J6.4 Q4.3 R10.1
SCL2: J7.4 J8.4 J9.4 Q6.3 R15.1
SCL3: J10.4 J11.4 J12.4 Q8.3 R20.1
SCL4: J13.4 J14.4 J15.4 Q10.3 R25.1
SCL5: J16.4 J17.4 J18.4 Q12.3 R30.1
SCL6: J19.4 J20.4 J21.4 Q14.3 R35.1
SCL7: J22.4 J23.4 J24.4 Q16.3 R40.1
SCL8: J25.4 J26.4 J27.4 Q18.3 R45.1
SDA: J2.3 J3.3 J4.3 Q1.3 R1.1
SDA1: J1.3 J5.3 J6.3 Q3.3 R5.1
SDA2: J7.3 J8.3 J9.3 Q5.3 R12.1
SDA3: J10.3 J11.3 J12.3 Q7.3 R17.1
SDA4: J13.3 J14.3 J15.3 Q9.3 R22.1
SDA5: J16.3 J17.3 J18.3 Q11.3 R27.1
SDA6: J19.3 J20.3 J21.3 Q13.3 R32.1
SDA7: J22.3 J23.3 J24.3 Q15.3 R37.1
SDA8: J25.3 J26.3 J27.3 Q17.3 R42.1

## Tracks (layer width: path | path; a pad name or v marks a point on that pad's centre or on a via)
1.8V
  Top 0.152: 17.78,22.1 C4.1 | U1.5 21.59,19.56 22.1,19.05 22.1,18.51 21.62,18.03 | 17.21,21.02 17.87,20.36 U1.1 | 17.21,21.02 16.59,20.4 16.59,18.57 17.12,18.03 18.61,18.03 | 21.62,18.03 18.61,18.03 | U2.5 18.61,18.03 | 17.21,21.02 17.21,21.53 17.78,22.1 | 17.78,22.1 17.53,22.35 17.53,22.86 17.58,22.86 | 20.83,26.54 20.32,26.54 19.56,25.78 19.56,23.37 19.05,22.86 18.29,22.86 | R2.2 18.29,22.86 | R6.2 20.83,26.54 | C2.1 22.1,17.55 21.62,18.03 | Q2.1 21.41,26.54 20.83,26.54 | Q1.1 17.58,22.86 | 17.58,22.86 18.29,22.86
1.8V1
  Top 0.152: 43.69,22.1 C3.1 | U3.5 47.5,19.56 48.01,19.05 48.01,18.51 47.53,18.03 | 43.12,21.02 43.78,20.36 U3.1 | 43.12,21.02 42.49,20.4 42.49,18.57 43.02,18.03 44.52,18.03 | 47.53,18.03 44.52,18.03 | U4.5 44.52,18.03 | 43.12,21.02 43.12,21.53 43.69,22.1 | 43.69,22.1 43.43,22.35 43.43,22.86 43.48,22.86 | 46.74,26.54 46.23,26.54 45.47,25.78 45.47,23.37 44.96,22.86 44.2,22.86 | R8.2 44.2,22.86 | R9.2 46.74,26.54 | C6.1 48.01,17.55 47.53,18.03 | Q4.1 47.32,26.54 46.74,26.54 | Q3.1 43.48,22.86 | 43.48,22.86 44.2,22.86
1.8V2
  Top 0.152: 69.6,22.1 C7.1 | U5.5 73.41,19.56 73.91,19.05 73.91,18.51 73.43,18.03 | 69.02,21.02 69.69,20.36 U5.1 | 69.02,21.02 68.4,20.4 68.4,18.57 68.93,18.03 70.42,18.03 | 73.43,18.03 70.42,18.03 | U6.5 70.42,18.03 | 69.02,21.02 69.02,21.53 69.6,22.1 | 69.6,22.1 69.34,22.35 69.34,22.86 69.39,22.86 | 72.64,26.54 72.14,26.54 71.37,25.78 71.37,23.37 70.87,22.86 70.1,22.86 | R13.2 70.1,22.86 | R14.2 72.64,26.54 | C9.1 73.91,17.55 73.43,18.03 | Q6.1 73.23,26.54 72.64,26.54 | Q5.1 69.39,22.86 | 69.39,22.86 70.1,22.86
1.8V3
  Top 0.152: 17.78,48.01 C10.1 | U7.5 21.59,45.47 22.1,44.96 22.1,44.42 21.62,43.94 | 17.21,46.93 17.87,46.27 U7.1 | 17.21,46.93 16.59,46.3 16.59,44.47 17.12,43.94 18.61,43.94 | 21.62,43.94 18.61,43.94 | U8.5 18.61,43.94 | 17.21,46.93 17.21,47.43 17.78,48.01 | 17.78,48.01 17.53,48.26 17.53,48.77 17.58,48.77 | 20.83,52.45 20.32,52.45 19.56,51.69 19.56,49.28 19.05,48.77 18.29,48.77 | R18.2 18.29,48.77 | R19.2 20.83,52.45 | C12.1 22.1,43.46 21.62,43.94 | Q8.1 21.41,52.45 20.83,52.45 | Q7.1 17.58,48.77 | 17.58,48.77 18.29,48.77
1.8V4
  Top 0.152: 43.69,48.01 C13.1 | U9.5 47.5,45.47 48.01,44.96 48.01,44.42 47.53,43.94 | 43.12,46.93 43.78,46.27 U9.1 | 43.12,46.93 42.49,46.3 42.49,44.47 43.02,43.94 44.52,43.94 | 47.53,43.94 44.52,43.94 | U10.5 44.52,43.94 | 43.12,46.93 43.12,47.43 43.69,48.01 | 43.69,48.01 43.43,48.26 43.43,48.77 43.48,48.77 | 46.74,52.45 46.23,52.45 45.47,51.69 45.47,49.28 44.96,48.77 44.2,48.77 | R23.2 44.2,48.77 | R24.2 46.74,52.45 | C15.1 48.01,43.46 47.53,43.94 | Q10.1 47.32,52.45 46.74,52.45 | Q9.1 43.48,48.77 | 43.48,48.77 44.2,48.77
1.8V5
  Top 0.152: 69.6,48.01 C16.1 | U11.5 73.41,45.47 73.91,44.96 73.91,44.42 73.43,43.94 | 69.02,46.93 69.69,46.27 U11.1 | 69.02,46.93 68.4,46.3 68.4,44.47 68.93,43.94 70.42,43.94 | 73.43,43.94 70.42,43.94 | U12.5 70.42,43.94 | 69.02,46.93 69.02,47.43 69.6,48.01 | 69.6,48.01 69.34,48.26 69.34,48.77 69.39,48.77 | 72.64,52.45 72.14,52.45 71.37,51.69 71.37,49.28 70.87,48.77 70.1,48.77 | R28.2 70.1,48.77 | R29.2 72.64,52.45 | C18.1 73.91,43.46 73.43,43.94 | Q12.1 73.23,52.45 72.64,52.45 | Q11.1 69.39,48.77 | 69.39,48.77 70.1,48.77
1.8V6
  Top 0.152: 17.78,73.91 C19.1 | U13.5 21.59,71.37 22.1,70.87 22.1,70.33 21.62,69.85 | 17.21,72.84 17.87,72.17 U13.1 | 17.21,72.84 16.59,72.21 16.59,70.38 17.12,69.85 18.61,69.85 | 21.62,69.85 18.61,69.85 | U14.5 18.61,69.85 | 17.21,72.84 17.21,73.34 17.78,73.91 | 17.78,73.91 17.53,74.17 17.53,74.68 17.58,74.68 | 20.83,78.36 20.32,78.36 19.56,77.6 19.56,75.18 19.05,74.68 18.29,74.68 | R33.2 18.29,74.68 | R34.2 20.83,78.36 | C21.1 22.1,69.37 21.62,69.85 | Q14.1 21.41,78.36 20.83,78.36 | Q13.1 17.58,74.68 | 17.58,74.68 18.29,74.68
1.8V7
  Top 0.152: 43.69,73.91 C22.1 | U15.5 47.5,71.37 48.01,70.87 48.01,70.33 47.53,69.85 | 43.12,72.84 43.78,72.17 U15.1 | 43.12,72.84 42.49,72.21 42.49,70.38 43.02,69.85 44.52,69.85 | 47.53,69.85 44.52,69.85 | U16.5 44.52,69.85 | 43.12,72.84 43.12,73.34 43.69,73.91 | 43.69,73.91 43.43,74.17 43.43,74.68 43.48,74.68 | 46.74,78.36 46.23,78.36 45.47,77.6 45.47,75.18 44.96,74.68 44.2,74.68 | R38.2 44.2,74.68 | R39.2 46.74,78.36 | C24.1 48.01,69.37 47.53,69.85 | Q16.1 47.32,78.36 46.74,78.36 | Q15.1 43.48,74.68 | 43.48,74.68 44.2,74.68
1.8V8
  Top 0.152: 69.6,73.91 C25.1 | U17.5 73.41,71.37 73.91,70.87 73.91,70.33 73.43,69.85 | 69.02,72.84 69.69,72.17 U17.1 | 69.02,72.84 68.4,72.21 68.4,70.38 68.93,69.85 70.42,69.85 | 73.43,69.85 70.42,69.85 | U18.5 70.42,69.85 | 69.02,72.84 69.02,73.34 69.6,73.91 | 69.6,73.91 69.34,74.17 69.34,74.68 69.39,74.68 | 72.64,78.36 72.14,78.36 71.37,77.6 71.37,75.18 70.87,74.68 70.1,74.68 | R43.2 70.1,74.68 | R44.2 72.64,78.36 | C27.1 73.91,69.37 73.43,69.85 | Q18.1 73.23,78.36 72.64,78.36 | Q17.1 69.39,74.68 | 69.39,74.68 70.1,74.68
3.3V  (via drill 0.3)
  Top 0.152: 27.05,19.06 J4.2 27.95,19.06 28.45,19.56 28.45,24.51 26.54,26.42 26.04,26.42 25.91,26.29 R7.2 | R1.2 13.21,26.29 13.08,26.42 12.57,26.42 10.67,24.51 10.67,20.32 10.93,20.06 J2.2 | C1.1 17.02,11.56 | U2.1 18.61,11.62 18.67,11.56 | 20.45,11.56 20.51,11.62 U2.3
  Top 0.254: J2.2 v13.84,20.07 | v19.56,15.75 20.83,15.75 21.32,15.26 | 27.05,19.06 25.53,19.06 24.26,17.79 24.26,16.8 22.71,15.26 21.32,15.26 | R3.2 17.02,11.56 18.67,11.56 20.45,11.56 21.08,11.56 21.32,11.79 21.32,15.26
  Bottom 0.254: v13.84,20.07 13.84,19.23 17.33,15.75 v19.56,15.75 20.32,14.99 20.32,10.16 J3.2
3.3V1  (via drill 0.3)
  Top 0.152: 52.96,19.06 J6.2 53.86,19.06 54.36,19.56 54.36,24.51 52.45,26.42 51.94,26.42 51.82,26.29 R10.2 | R5.2 39.12,26.29 38.99,26.42 38.48,26.42 36.58,24.51 36.58,20.32 36.84,20.06 J1.2 | C5.1 42.93,11.56 | U4.1 44.52,11.62 44.58,11.56 | 46.35,11.56 46.42,11.62 U4.3
  Top 0.254: J1.2 v39.75,20.07 | v45.47,15.75 46.74,15.75 47.22,15.26 | 52.96,19.06 51.43,19.06 50.16,17.79 50.16,16.8 48.62,15.26 47.22,15.26 | R4.2 42.93,11.56 44.58,11.56 46.35,11.56 46.99,11.56 47.23,11.79 47.23,15.26 47.22,15.26
  Bottom 0.254: v39.75,20.07 39.75,19.23 43.23,15.75 v45.47,15.75 46.23,14.99 46.23,10.16 J5.2
3.3V2  (via drill 0.3)
  Top 0.152: 78.87,19.06 J9.2 79.76,19.06 80.26,19.56 80.26,24.51 78.36,26.42 77.85,26.42 77.72,26.29 R15.2 | R12.2 65.02,26.29 64.9,26.42 64.39,26.42 62.48,24.51 62.48,20.32 62.75,20.06 J7.2 | C8.1 68.83,11.56 | U6.1 70.42,11.62 70.48,11.56 | 72.26,11.56 72.32,11.62 U6.3
  Top 0.254: J7.2 v65.66,20.07 | v71.37,15.75 72.64,15.75 73.13,15.26 | 78.87,19.06 77.34,19.06 76.07,17.79 76.07,16.8 74.53,15.26 73.13,15.26 | R11.2 68.83,11.56 70.48,11.56 72.26,11.56 72.9,11.56 73.14,11.79 73.14,15.26 73.13,15.26
  Bottom 0.254: v65.66,20.07 65.66,19.23 69.14,15.75 v71.37,15.75 72.14,14.99 72.14,10.16 J8.2
3.3V3  (via drill 0.3)
  Top 0.152: 27.05,44.97 J12.2 27.95,44.97 28.45,45.47 28.45,50.42 26.54,52.32 26.04,52.32 25.91,52.2 R20.2 | R17.2 13.21,52.2 13.08,52.32 12.57,52.32 10.67,50.42 10.67,46.23 10.93,45.97 J10.2 | C11.1 17.02,37.46 | U8.1 18.61,37.53 18.67,37.46 | 20.45,37.46 20.51,37.53 U8.3
  Top 0.254: J10.2 v13.84,45.97 | v19.56,41.66 20.83,41.66 21.32,41.17 | 27.05,44.97 25.53,44.97 24.26,43.7 24.26,42.71 22.71,41.17 21.32,41.17 | R16.2 17.02,37.46 18.67,37.46 20.45,37.46 21.08,37.46 21.32,37.7 21.32,41.16 21.32,41.17
  Bottom 0.254: v13.84,45.97 13.84,45.14 17.33,41.66 v19.56,41.66 20.32,40.89 20.32,36.07 J11.2
3.3V4  (via drill 0.3)
  Top 0.152: 52.96,44.97 J15.2 53.86,44.97 54.36,45.47 54.36,50.42 52.45,52.32 51.94,52.32 51.82,52.2 R25.2 | R22.2 39.12,52.2 38.99,52.32 38.48,52.32 36.58,50.42 36.58,46.23 36.84,45.97 J13.2 | C14.1 42.93,37.46 | U10.1 44.52,37.53 44.58,37.46 | 46.35,37.46 46.42,37.53 U10.3
  Top 0.254: J13.2 v39.75,45.97 | v45.47,41.66 46.74,41.66 47.22,41.17 | 52.96,44.97 51.43,44.97 50.16,43.7 50.16,42.71 48.62,41.17 47.22,41.17 | R21.2 42.93,37.46 44.58,37.46 46.35,37.46 46.99,37.46 47.23,37.7 47.23,41.16 47.22,41.17
  Bottom 0.254: v39.75,45.97 39.75,45.14 43.23,41.66 v45.47,41.66 46.23,40.89 46.23,36.07 J14.2
3.3V5  (via drill 0.3)
  Top 0.152: 78.87,44.97 J18.2 79.76,44.97 80.26,45.47 80.26,50.42 78.36,52.32 77.85,52.32 77.72,52.2 R30.2 | R27.2 65.02,52.2 64.9,52.32 64.39,52.32 62.48,50.42 62.48,46.23 62.75,45.97 J16.2 | C17.1 68.83,37.46 | U12.1 70.42,37.53 70.48,37.46 | 72.26,37.46 72.32,37.53 U12.3
  Top 0.254: J16.2 v65.66,45.97 | v71.37,41.66 72.64,41.66 73.13,41.17 | 78.87,44.97 77.34,44.97 76.07,43.7 76.07,42.71 74.53,41.17 73.13,41.17 | R26.2 68.83,37.46 70.48,37.46 72.26,37.46 72.9,37.46 73.14,37.7 73.14,41.16 73.13,41.17
  Bottom 0.254: v65.66,45.97 65.66,45.14 69.14,41.66 v71.37,41.66 72.14,40.89 72.14,36.07 J17.2
3.3V6  (via drill 0.3)
  Top 0.152: 27.05,70.87 J21.2 27.95,70.87 28.45,71.37 28.45,76.33 26.54,78.23 26.04,78.23 25.91,78.11 R35.2 | R32.2 13.21,78.11 13.08,78.23 12.57,78.23 10.67,76.33 10.67,72.14 10.93,71.87 J19.2 | C20.1 17.02,63.37 | U14.1 18.61,63.43 18.67,63.37 | 20.45,63.37 20.51,63.43 U14.3
  Top 0.254: J19.2 v13.84,71.88 | v19.56,67.56 20.83,67.56 21.32,67.08 | 27.05,70.87 25.53,70.87 24.26,69.6 24.26,68.62 22.71,67.08 21.32,67.08 | R31.2 17.02,63.37 18.67,63.37 20.45,63.37 21.08,63.37 21.32,63.61 21.32,67.07 21.32,67.08
  Bottom 0.254: v13.84,71.88 13.84,71.05 17.33,67.56 v19.56,67.56 20.32,66.8 20.32,61.98 J20.2
3.3V7  (via drill 0.3)
  Top 0.152: 52.96,70.87 J24.2 53.86,70.87 54.36,71.37 54.36,76.33 52.45,78.23 51.94,78.23 51.82,78.11 R40.2 | R37.2 39.12,78.11 38.99,78.23 38.48,78.23 36.58,76.33 36.58,72.14 36.84,71.87 J22.2 | C23.1 42.93,63.37 | U16.1 44.52,63.43 44.58,63.37 | 46.35,63.37 46.42,63.43 U16.3
  Top 0.254: J22.2 v39.75,71.88 | v45.47,67.56 46.74,67.56 47.22,67.08 | 52.96,70.87 51.43,70.87 50.16,69.6 50.16,68.62 48.62,67.08 47.22,67.08 | R36.2 42.93,63.37 44.58,63.37 46.35,63.37 46.99,63.37 47.23,63.61 47.23,67.07 47.22,67.08
  Bottom 0.254: v39.75,71.88 39.75,71.05 43.23,67.56 v45.47,67.56 46.23,66.8 46.23,61.98 J23.2
3.3V8  (via drill 0.3)
  Top 0.152: 78.87,70.87 J27.2 79.76,70.87 80.26,71.37 80.26,76.33 78.36,78.23 77.85,78.23 77.72,78.11 R45.2 | R42.2 65.02,78.11 64.9,78.23 64.39,78.23 62.48,76.33 62.48,72.14 62.75,71.87 J25.2 | C26.1 68.83,63.37 | U18.1 70.42,63.43 70.48,63.37 | 72.26,63.37 72.32,63.43 U18.3
  Top 0.254: J25.2 v65.66,71.88 | v71.37,67.56 72.64,67.56 73.13,67.08 | 78.87,70.87 77.34,70.87 76.07,69.6 76.07,68.62 74.53,67.08 73.13,67.08 | R41.2 68.83,63.37 70.48,63.37 72.26,63.37 72.9,63.37 73.14,63.61 73.14,67.07 73.13,67.08
  Bottom 0.254: v65.66,71.88 65.66,71.05 69.14,67.56 v71.37,67.56 72.14,66.8 72.14,61.98 J26.2
GND  (via drill 0.3)
  Top 0.152: 17.78,19.56 U1.2 19.3,19.56 | C4.2 v21.46,22.1 | J2.1 13.44,21.06 v13.46,21.08 | J4.1 25.68,18.06 v25.65,18.03 | U1.4 20.73,18.78 v21.48,18.78 | 19.3,19.56 19.43,19.56 | 20.07,18.8 19.3,19.56 | U2.2 19.56,14.73 18.2,16.09 C1.2
  Top 0.254: v17.4,19.81 17.53,19.81 17.78,19.56 | C1.2 15.41,16.09 v15.37,16.13 | U1.2 19.43,19.56 | 19.43,19.56 U1.DIEPAD 19.56,20.83 | U1.4 20.1,18.76 20.07,18.8 19.43,19.43 19.43,19.56
  Bottom 0.254: v21.48,18.78 22.15,19.46 22.86,19.46 23.37,19.97 v23.37,20.83
  other vias: 15.49,21.08 22.1,12.7 23.62,18.03 27.18,23.37 19.56,12.7
  pour Bottom (isolate 0.305): 6.86,6.86 6.86,32.26 32.26,32.26 32.26,6.86
  pour Top (isolate 0.305): 6.86,6.86 6.86,32.26 32.26,32.26 32.26,6.86
GND1  (via drill 0.3)
  Top 0.152: 43.69,19.56 U3.2 45.21,19.56 | C3.2 v47.37,22.1 | J1.1 39.35,21.06 v39.37,21.08 | J6.1 51.59,18.06 v51.56,18.03 | U3.4 46.64,18.78 v47.38,18.78 | 45.21,19.56 45.34,19.56 | 45.97,18.8 45.21,19.56 | U4.2 45.47,14.73 44.11,16.09 C5.2
  Top 0.254: v43.31,19.81 43.43,19.81 43.69,19.56 | C5.2 41.31,16.09 v41.27,16.13 | U3.2 45.34,19.56 | 45.34,19.56 U3.DIEPAD 45.47,20.83 | U3.4 46.01,18.76 45.97,18.8 45.34,19.43 45.34,19.56
  Bottom 0.254: v47.38,18.78 48.06,19.46 48.77,19.46 49.28,19.97 v49.28,20.83
  other vias: 41.4,21.08 48.01,12.7 49.53,18.03 53.09,23.37 45.47,12.7
  pour Bottom (isolate 0.305): 32.77,6.86 32.77,32.26 58.17,32.26 58.17,6.86
  pour Top (isolate 0.305): 32.77,6.86 32.77,32.26 58.17,32.26 58.17,6.86
GND2  (via drill 0.3)
  Top 0.152: 69.6,19.56 U5.2 71.12,19.56 | C7.2 v73.28,22.1 | J7.1 65.25,21.06 v65.28,21.08 | J9.1 77.49,18.06 v77.47,18.03 | U5.4 72.55,18.78 v73.29,18.78 | 71.12,19.56 71.25,19.56 | 71.88,18.8 71.12,19.56 | U6.2 71.37,14.73 70.02,16.09 C8.2
  Top 0.254: v69.22,19.81 69.34,19.81 69.6,19.56 | C8.2 67.22,16.09 v67.18,16.13 | U5.2 71.25,19.56 | 71.25,19.56 U5.DIEPAD 71.37,20.83 | U5.4 71.92,18.76 71.88,18.8 71.25,19.43 71.25,19.56
  Bottom 0.254: v73.29,18.78 73.97,19.46 74.67,19.46 75.18,19.97 v75.18,20.83
  other vias: 67.31,21.08 73.91,12.7 75.44,18.03 78.99,23.37 71.37,12.7
  pour Bottom (isolate 0.305): 58.67,6.86 58.67,32.26 84.07,32.26 84.07,6.86
  pour Top (isolate 0.305): 58.67,6.86 58.67,32.26 84.07,32.26 84.07,6.86
GND3  (via drill 0.3)
  Top 0.152: 17.78,45.47 U7.2 19.3,45.47 | C10.2 v21.46,48.01 | J10.1 13.44,46.97 v13.46,46.99 | J12.1 25.68,43.97 v25.65,43.94 | U7.4 20.73,44.69 v21.48,44.69 | 19.3,45.47 19.43,45.47 | 20.07,44.7 19.3,45.47 | U8.2 19.56,40.64 18.2,42 C11.2
  Top 0.254: v17.4,45.72 17.53,45.72 17.78,45.47 | C11.2 15.41,42 v15.37,42.04 | U7.2 19.43,45.47 | 19.43,45.47 U7.DIEPAD 19.56,46.74 | U7.4 20.1,44.67 20.07,44.7 19.43,45.34 19.43,45.47
  Bottom 0.254: v21.48,44.69 22.15,45.36 22.86,45.36 23.37,45.87 v23.37,46.74
  other vias: 15.49,46.99 22.1,38.61 23.62,43.94 27.18,49.28 19.56,38.61
  pour Bottom (isolate 0.305): 6.86,32.77 6.86,58.17 32.26,58.17 32.26,32.77
  pour Top (isolate 0.305): 6.86,32.77 6.86,58.17 32.26,58.17 32.26,32.77
GND4  (via drill 0.3)
  Top 0.152: 43.69,45.47 U9.2 45.21,45.47 | C13.2 v47.37,48.01 | J13.1 39.35,46.97 v39.37,46.99 | J15.1 51.59,43.97 v51.56,43.94 | U9.4 46.64,44.69 v47.38,44.69 | 45.21,45.47 45.34,45.47 | 45.97,44.7 45.21,45.47 | U10.2 45.47,40.64 44.11,42 C14.2
  Top 0.254: v43.31,45.72 43.43,45.72 43.69,45.47 | C14.2 41.31,42 v41.27,42.04 | U9.2 45.34,45.47 | 45.34,45.47 U9.DIEPAD 45.47,46.74 | U9.4 46.01,44.67 45.97,44.7 45.34,45.34 45.34,45.47
  Bottom 0.254: v47.38,44.69 48.06,45.36 48.77,45.36 49.28,45.87 v49.28,46.74
  other vias: 41.4,46.99 48.01,38.61 49.53,43.94 53.09,49.28 45.47,38.61
  pour Bottom (isolate 0.305): 32.77,32.77 32.77,58.17 58.17,58.17 58.17,32.77
  pour Top (isolate 0.305): 32.77,32.77 32.77,58.17 58.17,58.17 58.17,32.77
GND5  (via drill 0.3)
  Top 0.152: 69.6,45.47 U11.2 71.12,45.47 | C16.2 v73.28,48.01 | J16.1 65.25,46.97 v65.28,46.99 | J18.1 77.49,43.97 v77.47,43.94 | U11.4 72.55,44.69 v73.29,44.69 | 71.12,45.47 71.25,45.47 | 71.88,44.7 71.12,45.47 | U12.2 71.37,40.64 70.02,42 C17.2
  Top 0.254: v69.22,45.72 69.34,45.72 69.6,45.47 | C17.2 67.22,42 v67.18,42.04 | U11.2 71.25,45.47 | 71.25,45.47 U11.DIEPAD 71.37,46.74 | U11.4 71.92,44.67 71.88,44.7 71.25,45.34 71.25,45.47
  Bottom 0.254: v73.29,44.69 73.97,45.36 74.67,45.36 75.18,45.87 v75.18,46.74
  other vias: 67.31,46.99 73.91,38.61 75.44,43.94 78.99,49.28 71.37,38.61
  pour Bottom (isolate 0.305): 58.67,32.77 58.67,58.17 84.07,58.17 84.07,32.77
  pour Top (isolate 0.305): 58.67,32.77 58.67,58.17 84.07,58.17 84.07,32.77
GND6  (via drill 0.3)
  Top 0.152: 17.78,71.37 U13.2 19.3,71.37 | C19.2 v21.46,73.91 | J19.1 13.44,72.87 v13.46,72.9 | J21.1 25.68,69.87 v25.65,69.85 | U13.4 20.73,70.6 v21.48,70.6 | 19.3,71.37 19.43,71.37 | 20.07,70.61 19.3,71.37 | U14.2 19.56,66.55 18.2,67.91 C20.2
  Top 0.254: v17.4,71.63 17.53,71.63 17.78,71.37 | C20.2 15.41,67.91 v15.37,67.95 | U13.2 19.43,71.37 | 19.43,71.37 U13.DIEPAD 19.56,72.64 | U13.4 20.1,70.57 20.07,70.61 19.43,71.25 19.43,71.37
  Bottom 0.254: v21.48,70.6 22.15,71.27 22.86,71.27 23.37,71.78 v23.37,72.64
  other vias: 15.49,72.9 22.1,64.52 23.62,69.85 27.18,75.18 19.56,64.52
  pour Bottom (isolate 0.305): 6.86,58.67 6.86,84.07 32.26,84.07 32.26,58.67
  pour Top (isolate 0.305): 6.86,58.67 6.86,84.07 32.26,84.07 32.26,58.67
GND7  (via drill 0.3)
  Top 0.152: 43.69,71.37 U15.2 45.21,71.37 | C22.2 v47.37,73.91 | J22.1 39.35,72.87 v39.37,72.9 | J24.1 51.59,69.87 v51.56,69.85 | U15.4 46.64,70.6 v47.38,70.6 | 45.21,71.37 45.34,71.37 | 45.97,70.61 45.21,71.37 | U16.2 45.47,66.55 44.11,67.91 C23.2
  Top 0.254: v43.31,71.63 43.43,71.63 43.69,71.37 | C23.2 41.31,67.91 v41.27,67.95 | U15.2 45.34,71.37 | 45.34,71.37 U15.DIEPAD 45.47,72.64 | U15.4 46.01,70.57 45.97,70.61 45.34,71.25 45.34,71.37
  Bottom 0.254: v47.38,70.6 48.06,71.27 48.77,71.27 49.28,71.78 v49.28,72.64
  other vias: 41.4,72.9 48.01,64.52 49.53,69.85 53.09,75.18 45.47,64.52
  pour Bottom (isolate 0.305): 32.77,58.67 32.77,84.07 58.17,84.07 58.17,58.67
  pour Top (isolate 0.305): 32.77,58.67 32.77,84.07 58.17,84.07 58.17,58.67
GND8  (via drill 0.3)
  Top 0.152: 69.6,71.37 U17.2 71.12,71.37 | C25.2 v73.28,73.91 | J25.1 65.25,72.87 v65.28,72.9 | J27.1 77.49,69.87 v77.47,69.85 | U17.4 72.55,70.6 v73.29,70.6 | 71.12,71.37 71.25,71.37 | 71.88,70.61 71.12,71.37 | U18.2 71.37,66.55 70.02,67.91 C26.2
  Top 0.254: v69.22,71.63 69.34,71.63 69.6,71.37 | C26.2 67.22,67.91 v67.18,67.95 | U17.2 71.25,71.37 | 71.25,71.37 U17.DIEPAD 71.37,72.64 | U17.4 71.92,70.57 71.88,70.61 71.25,71.25 71.25,71.37
  Bottom 0.254: v73.29,70.6 73.97,71.27 74.67,71.27 75.18,71.78 v75.18,72.64
  other vias: 67.31,72.9 73.91,64.52 75.44,69.85 78.99,75.18 71.37,64.52
  pour Bottom (isolate 0.305): 58.67,58.67 58.67,84.07 84.07,84.07 84.07,58.67
  pour Top (isolate 0.305): 58.67,58.67 58.67,84.07 84.07,84.07 84.07,58.67
LSCL
  Top 0.152: U1.6 21.25,20.36 22.48,21.59 22.48,22.61 22.23,22.86 21.84,22.86 | R6.1 20.83,22.99 20.95,22.86 21.84,22.86 | Q2.2 21.84,23.16 21.84,22.86
LSCL1
  Top 0.152: U3.6 47.15,20.36 48.39,21.59 48.39,22.61 48.13,22.86 47.75,22.86 | R9.1 46.74,22.99 46.86,22.86 47.75,22.86 | Q4.2 47.75,23.16 47.75,22.86
LSCL2
  Top 0.152: U5.6 73.06,20.36 74.3,21.59 74.3,22.61 74.04,22.86 73.66,22.86 | R14.1 72.64,22.99 72.77,22.86 73.66,22.86 | Q6.2 73.66,23.16 73.66,22.86
LSCL3
  Top 0.152: U7.6 21.25,46.27 22.48,47.5 22.48,48.51 22.23,48.77 21.84,48.77 | R19.1 20.83,48.89 20.95,48.77 21.84,48.77 | Q8.2 21.84,49.07 21.84,48.77
LSCL4
  Top 0.152: U9.6 47.15,46.27 48.39,47.5 48.39,48.51 48.13,48.77 47.75,48.77 | R24.1 46.74,48.89 46.86,48.77 47.75,48.77 | Q10.2 47.75,49.07 47.75,48.77
LSCL5
  Top 0.152: U11.6 73.06,46.27 74.3,47.5 74.3,48.51 74.04,48.77 73.66,48.77 | R29.1 72.64,48.89 72.77,48.77 73.66,48.77 | Q12.2 73.66,49.07 73.66,48.77
LSCL6
  Top 0.152: U13.6 21.25,72.17 22.48,73.41 22.48,74.42 22.23,74.68 21.84,74.68 | R34.1 20.83,74.8 20.95,74.68 21.84,74.68 | Q14.2 21.84,74.98 21.84,74.68
LSCL7
  Top 0.152: U15.6 47.15,72.17 48.39,73.41 48.39,74.42 48.13,74.68 47.75,74.68 | R39.1 46.74,74.8 46.86,74.68 47.75,74.68 | Q16.2 47.75,74.98 47.75,74.68
LSCL8
  Top 0.152: U17.6 73.06,72.17 74.3,73.41 74.3,74.42 74.04,74.68 73.66,74.68 | R44.1 72.64,74.8 72.77,74.68 73.66,74.68 | Q18.2 73.66,74.98 73.66,74.68
LSDA  (via drill 0.3)
  Top 0.152: 18.29,26.42 v19.18,26.42 | R2.1 18.29,26.42 | U1.3 17.18,18.76 v17.14,18.8 | Q1.2 17.58,26.42 18.29,26.42
  Bottom 0.152: v17.14,18.8 17.6,19.25 17.63,19.25 19.18,20.8 v19.18,26.42
LSDA1  (via drill 0.3)
  Top 0.152: 44.2,26.42 v45.08,26.42 | R8.1 44.2,26.42 | U3.3 43.09,18.76 v43.05,18.8 | Q3.2 43.48,26.42 44.2,26.42
  Bottom 0.152: v43.05,18.8 43.51,19.25 43.54,19.25 45.08,20.8 v45.08,26.42
LSDA2  (via drill 0.3)
  Top 0.152: 70.1,26.42 v70.99,26.42 | R13.1 70.1,26.42 | U5.3 69,18.76 v68.96,18.8 | Q5.2 69.39,26.42 70.1,26.42
  Bottom 0.152: v68.96,18.8 69.42,19.25 69.45,19.25 70.99,20.8 v70.99,26.42
LSDA3  (via drill 0.3)
  Top 0.152: 18.29,52.32 v19.18,52.32 | R18.1 18.29,52.32 | U7.3 17.18,44.67 v17.14,44.7 | Q7.2 17.58,52.32 18.29,52.32
  Bottom 0.152: v17.14,44.7 17.6,45.16 17.63,45.16 19.18,46.71 v19.18,52.32
LSDA4  (via drill 0.3)
  Top 0.152: 44.2,52.32 v45.08,52.32 | R23.1 44.2,52.32 | U9.3 43.09,44.67 v43.05,44.7 | Q9.2 43.48,52.32 44.2,52.32
  Bottom 0.152: v43.05,44.7 43.51,45.16 43.54,45.16 45.08,46.71 v45.08,52.32
LSDA5  (via drill 0.3)
  Top 0.152: 70.1,52.32 v70.99,52.32 | R28.1 70.1,52.32 | U11.3 69,44.67 v68.96,44.7 | Q11.2 69.39,52.32 70.1,52.32
  Bottom 0.152: v68.96,44.7 69.42,45.16 69.45,45.16 70.99,46.71 v70.99,52.32
LSDA6  (via drill 0.3)
  Top 0.152: 18.29,78.23 v19.18,78.23 | R33.1 18.29,78.23 | U13.3 17.18,70.57 v17.14,70.61 | Q13.2 17.58,78.23 18.29,78.23
  Bottom 0.152: v17.14,70.61 17.6,71.07 17.63,71.07 19.18,72.62 v19.18,78.23
LSDA7  (via drill 0.3)
  Top 0.152: 44.2,78.23 v45.08,78.23 | R38.1 44.2,78.23 | U15.3 43.09,70.57 v43.05,70.61 | Q15.2 43.48,78.23 44.2,78.23
  Bottom 0.152: v43.05,70.61 43.51,71.07 43.54,71.07 45.08,72.62 v45.08,78.23
LSDA8  (via drill 0.3)
  Top 0.152: 70.1,78.23 v70.99,78.23 | R43.1 70.1,78.23 | U17.3 69,70.57 v68.96,70.61 | Q17.2 69.39,78.23 70.1,78.23
  Bottom 0.152: v68.96,70.61 69.42,71.07 69.45,71.07 70.99,72.62 v70.99,78.23
N$1
  Top 0.152: R4.1 34.42,11.56 34.04,11.94 34.04,12.7 34.29,12.95 D2.A
N$2
  Top 0.152: R11.1 60.32,11.56 59.94,11.94 59.94,12.7 60.2,12.95 D3.A
N$3
  Top 0.152: R3.1 8.51,11.56 8.13,11.94 8.13,12.7 8.38,12.95 D1.A
N$4
  Top 0.152: R16.1 8.51,37.46 8.13,37.85 8.13,38.61 8.38,38.86 D4.A
N$5
  Top 0.152: R21.1 34.42,37.46 34.04,37.85 34.04,38.61 34.29,38.86 D5.A
N$6
  Top 0.152: R26.1 60.32,37.46 59.94,37.85 59.94,38.61 60.2,38.86 D6.A
N$7
  Top 0.152: R31.1 8.51,63.37 8.13,63.75 8.13,64.52 8.38,64.77 D7.A
N$8
  Top 0.152: R36.1 34.42,63.37 34.04,63.75 34.04,64.52 34.29,64.77 D8.A
N$9
  Top 0.152: R41.1 60.32,63.37 59.94,63.75 59.94,64.52 60.2,64.77 D9.A
SCL  (via drill 0.3)
  Top 0.152: J4.4 27.15,21.08 v25.53,21.08 25.53,22.86 | v17.27,17.48 14.27,17.48 13.69,18.06 J2.4 | Q2.3 25.02,24.09 25.02,23.24 25.4,22.86 25.53,22.86 | 25.53,22.86 25.78,22.86 25.91,22.99 R7.1
  Bottom 0.152: v25.53,21.08 21.92,17.48 | 21.92,17.48 v17.27,17.48 | J3.4 23.37,16.03 21.92,17.48
SCL1  (via drill 0.3)
  Top 0.152: J6.4 53.06,21.08 v51.43,21.08 51.43,22.86 | v43.18,17.48 40.18,17.48 39.6,18.06 J1.4 | Q4.3 50.93,24.09 50.93,23.24 51.31,22.86 51.43,22.86 | 51.43,22.86 51.69,22.86 51.82,22.99 R10.1
  Bottom 0.152: v51.43,21.08 47.83,17.48 | 47.83,17.48 v43.18,17.48 | J5.4 49.28,16.03 47.83,17.48
SCL2  (via drill 0.3)
  Top 0.152: J9.4 78.97,21.08 v77.34,21.08 77.34,22.86 | v69.09,17.48 66.09,17.48 65.51,18.06 J7.4 | Q6.3 76.84,24.09 76.84,23.24 77.22,22.86 77.34,22.86 | 77.34,22.86 77.6,22.86 77.72,22.99 R15.1
  Bottom 0.152: v77.34,21.08 73.74,17.48 | 73.74,17.48 v69.09,17.48 | J8.4 75.18,16.03 73.74,17.48
SCL3  (via drill 0.3)
  Top 0.152: J12.4 27.15,46.99 v25.53,46.99 25.53,48.77 | v17.27,43.38 14.27,43.38 13.69,43.97 J10.4 | Q8.3 25.02,49.99 25.02,49.15 25.4,48.77 25.53,48.77 | 25.53,48.77 25.78,48.77 25.91,48.89 R20.1
  Bottom 0.152: v25.53,46.99 21.92,43.38 | 21.92,43.38 v17.27,43.38 | J11.4 23.37,41.93 21.92,43.38
SCL4  (via drill 0.3)
  Top 0.152: J15.4 53.06,46.99 v51.43,46.99 51.43,48.77 | v43.18,43.38 40.18,43.38 39.6,43.97 J13.4 | Q10.3 50.93,49.99 50.93,49.15 51.31,48.77 51.43,48.77 | 51.43,48.77 51.69,48.77 51.82,48.89 R25.1
  Bottom 0.152: v51.43,46.99 47.83,43.38 | 47.83,43.38 v43.18,43.38 | J14.4 49.28,41.93 47.83,43.38
SCL5  (via drill 0.3)
  Top 0.152: J18.4 78.97,46.99 v77.34,46.99 77.34,48.77 | v69.09,43.38 66.09,43.38 65.51,43.97 J16.4 | Q12.3 76.84,49.99 76.84,49.15 77.22,48.77 77.34,48.77 | 77.34,48.77 77.6,48.77 77.72,48.89 R30.1
  Bottom 0.152: v77.34,46.99 73.74,43.38 | 73.74,43.38 v69.09,43.38 | J17.4 75.18,41.93 73.74,43.38
SCL6  (via drill 0.3)
  Top 0.152: J21.4 27.15,72.9 v25.53,72.9 25.53,74.68 | v17.27,69.29 14.27,69.29 13.69,69.87 J19.4 | Q14.3 25.02,75.9 25.02,75.06 25.4,74.68 25.53,74.68 | 25.53,74.68 25.78,74.68 25.91,74.8 R35.1
  Bottom 0.152: v25.53,72.9 21.92,69.29 | 21.92,69.29 v17.27,69.29 | J20.4 23.37,67.84 21.92,69.29
SCL7  (via drill 0.3)
  Top 0.152: J24.4 53.06,72.9 v51.43,72.9 51.43,74.68 | v43.18,69.29 40.18,69.29 39.6,69.87 J22.4 | Q16.3 50.93,75.9 50.93,75.06 51.31,74.68 51.43,74.68 | 51.43,74.68 51.69,74.68 51.82,74.8 R40.1
  Bottom 0.152: v51.43,72.9 47.83,69.29 | 47.83,69.29 v43.18,69.29 | J23.4 49.28,67.84 47.83,69.29
SCL8  (via drill 0.3)
  Top 0.152: J27.4 78.97,72.9 v77.34,72.9 77.34,74.68 | v69.09,69.29 66.09,69.29 65.51,69.87 J25.4 | Q18.3 76.84,75.9 76.84,75.06 77.22,74.68 77.34,74.68 | 77.34,74.68 77.6,74.68 77.72,74.8 R45.1
  Bottom 0.152: v77.34,72.9 73.74,69.29 | 73.74,69.29 v69.09,69.29 | J26.4 75.18,67.84 73.74,69.29
SDA  (via drill 0.3)
  Top 0.152: J4.3 v22.61,20.06 v22.61,20.07 | v16.13,18.03 15.11,19.06 | 15.11,19.06 J2.3 | 15.11,19.06 15.11,20.58 13.97,21.72 13.97,22.86 | R1.1 13.21,22.99 13.34,22.86 13.97,22.86 | Q1.3 13.97,23.96 13.97,22.86
  Bottom 0.152: v22.61,20.07 19.3,20.07 17.27,18.03 v16.13,18.03 16.13,17.45 16.79,16.79 19.31,16.79 20.83,15.27 J3.3
SDA1  (via drill 0.3)
  Top 0.152: J6.3 v48.52,20.06 v48.51,20.07 | v42.04,18.03 41.01,19.06 | 41.01,19.06 J1.3 | 41.01,19.06 41.01,20.58 39.88,21.72 39.88,22.86 | R5.1 39.12,22.99 39.24,22.86 39.88,22.86 | Q3.3 39.88,23.96 39.88,22.86
  Bottom 0.152: v48.51,20.07 45.21,20.07 43.18,18.03 v42.04,18.03 42.04,17.45 42.7,16.79 45.21,16.79 46.74,15.27 J5.3
SDA2  (via drill 0.3)
  Top 0.152: J9.3 74.43,20.06 v74.42,20.07 | v67.95,18.03 66.92,19.06 | 66.92,19.06 J7.3 | 66.92,19.06 66.92,20.58 65.79,21.72 65.79,22.86 | R12.1 65.02,22.99 65.15,22.86 65.79,22.86 | Q5.3 65.79,23.96 65.79,22.86
  Bottom 0.152: v74.42,20.07 71.12,20.07 69.09,18.03 v67.95,18.03 67.95,17.45 68.61,16.79 71.12,16.79 72.64,15.27 J8.3
SDA3  (via drill 0.3)
  Top 0.152: J12.3 22.61,45.97 v22.61,45.97 | v16.13,43.94 15.11,44.97 | 15.11,44.97 J10.3 | 15.11,44.97 15.11,46.49 13.97,47.62 13.97,48.77 | R17.1 13.21,48.89 13.34,48.77 13.97,48.77 | Q7.3 13.97,49.87 13.97,48.77
  Bottom 0.152: v22.61,45.97 19.3,45.97 17.27,43.94 v16.13,43.94 16.13,43.36 16.79,42.7 19.31,42.7 20.83,41.18 J11.3
SDA4  (via drill 0.3)
  Top 0.152: J15.3 48.52,45.97 v48.51,45.97 | v42.04,43.94 41.01,44.97 | 41.01,44.97 J13.3 | 41.01,44.97 41.01,46.49 39.88,47.62 39.88,48.77 | R22.1 39.12,48.89 39.24,48.77 39.88,48.77 | Q9.3 39.88,49.87 39.88,48.77
  Bottom 0.152: v48.51,45.97 45.21,45.97 43.18,43.94 v42.04,43.94 42.04,43.36 42.7,42.7 45.21,42.7 46.74,41.18 J14.3
SDA5  (via drill 0.3)
  Top 0.152: J18.3 74.43,45.97 v74.42,45.97 | v67.95,43.94 66.92,44.97 | 66.92,44.97 J16.3 | 66.92,44.97 66.92,46.49 65.79,47.62 65.79,48.77 | R27.1 65.02,48.89 65.15,48.77 65.79,48.77 | Q11.3 65.79,49.87 65.79,48.77
  Bottom 0.152: v74.42,45.97 71.12,45.97 69.09,43.94 v67.95,43.94 67.95,43.36 68.61,42.7 71.12,42.7 72.64,41.18 J17.3
SDA6  (via drill 0.3)
  Top 0.152: J21.3 v22.61,71.87 v22.61,71.88 | v16.13,69.85 15.11,70.87 | 15.11,70.87 J19.3 | 15.11,70.87 15.11,72.4 13.97,73.53 13.97,74.68 | R32.1 13.21,74.8 13.34,74.68 13.97,74.68 | Q13.3 13.97,75.78 13.97,74.68
  Bottom 0.152: v22.61,71.88 19.3,71.88 17.27,69.85 v16.13,69.85 16.13,69.27 16.79,68.61 19.31,68.61 20.83,67.08 J20.3
SDA7  (via drill 0.3)
  Top 0.152: J24.3 v48.52,71.87 v48.51,71.88 | v42.04,69.85 41.01,70.87 | 41.01,70.87 J22.3 | 41.01,70.87 41.01,72.4 39.88,73.53 39.88,74.68 | R37.1 39.12,74.8 39.24,74.68 39.88,74.68 | Q15.3 39.88,75.78 39.88,74.68
  Bottom 0.152: v48.51,71.88 45.21,71.88 43.18,69.85 v42.04,69.85 42.04,69.27 42.7,68.61 45.21,68.61 46.74,67.08 J23.3
SDA8  (via drill 0.3)
  Top 0.152: J27.3 74.43,71.87 v74.42,71.88 | v67.95,69.85 66.92,70.87 | 66.92,70.87 J25.3 | 66.92,70.87 66.92,72.4 65.79,73.53 65.79,74.68 | R42.1 65.02,74.8 65.15,74.68 65.79,74.68 | Q17.3 65.79,75.78 65.79,74.68
  Bottom 0.152: v74.42,71.88 71.12,71.88 69.09,69.85 v67.95,69.85 67.95,69.27 68.61,68.61 71.12,68.61 72.64,67.08 J26.3

## Text on the board
Bottom: X02 | X02 | X02 | X02 | X02 | X02 | X02 | X02 | X02
Milling: v-score | v-score | v-score | v-score | v-score | v-score | v-score | v-score